# Altium PCB PIC_16g628aPCB.PcbDoc
Units mil, origin at the board's own origin, x right, y up, seen from the top; angles counter-clockwise.
Board outline 6000 x 4000 mil, 2 copper layers (Top Layer, Bottom Layer); 5 components, 18 nets, 45 pads, 0 vias.
Unrouted connection lines stored in the file: 26.
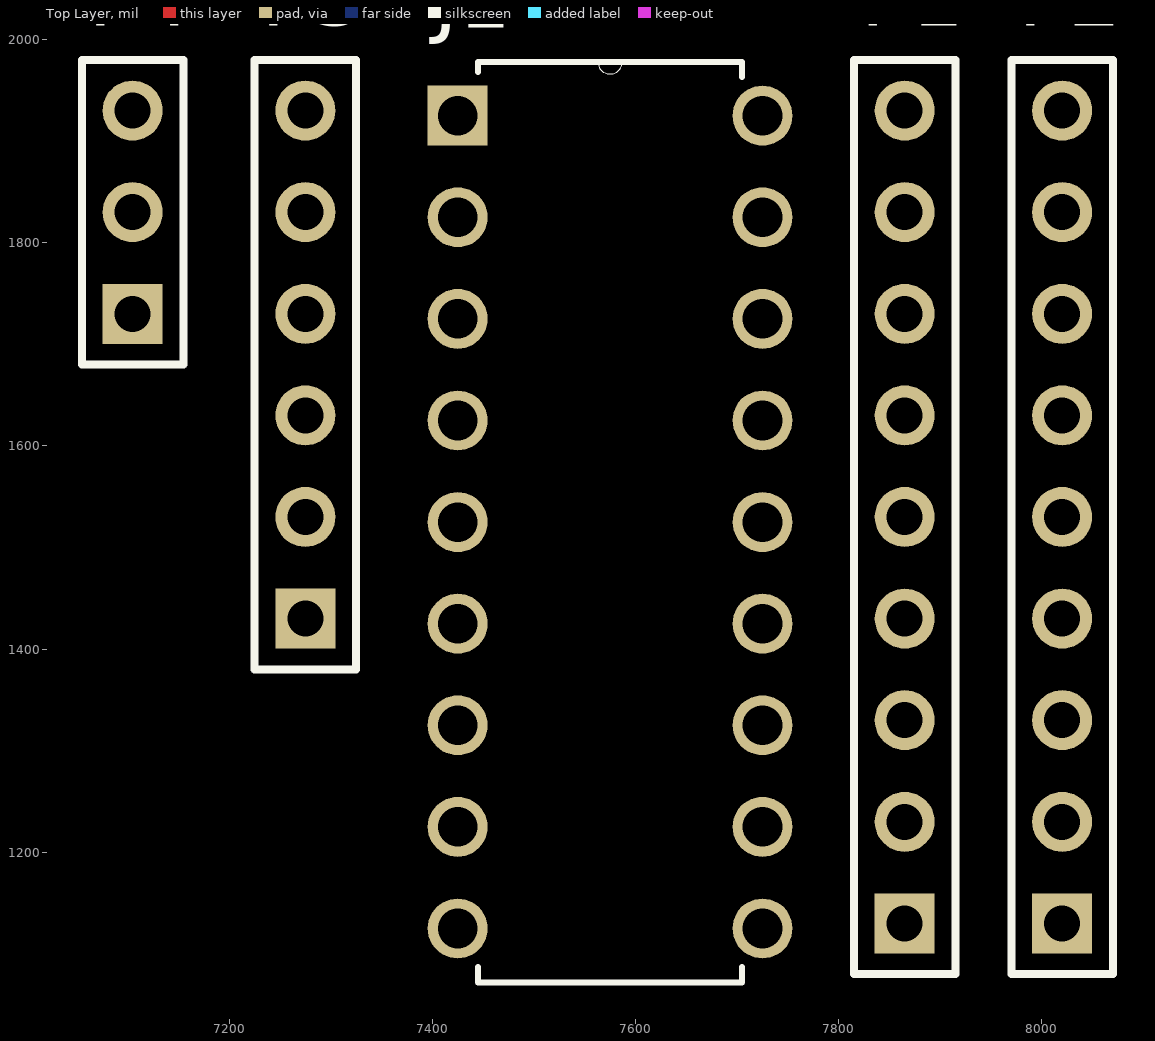
[diagram p0: Top Layer view]
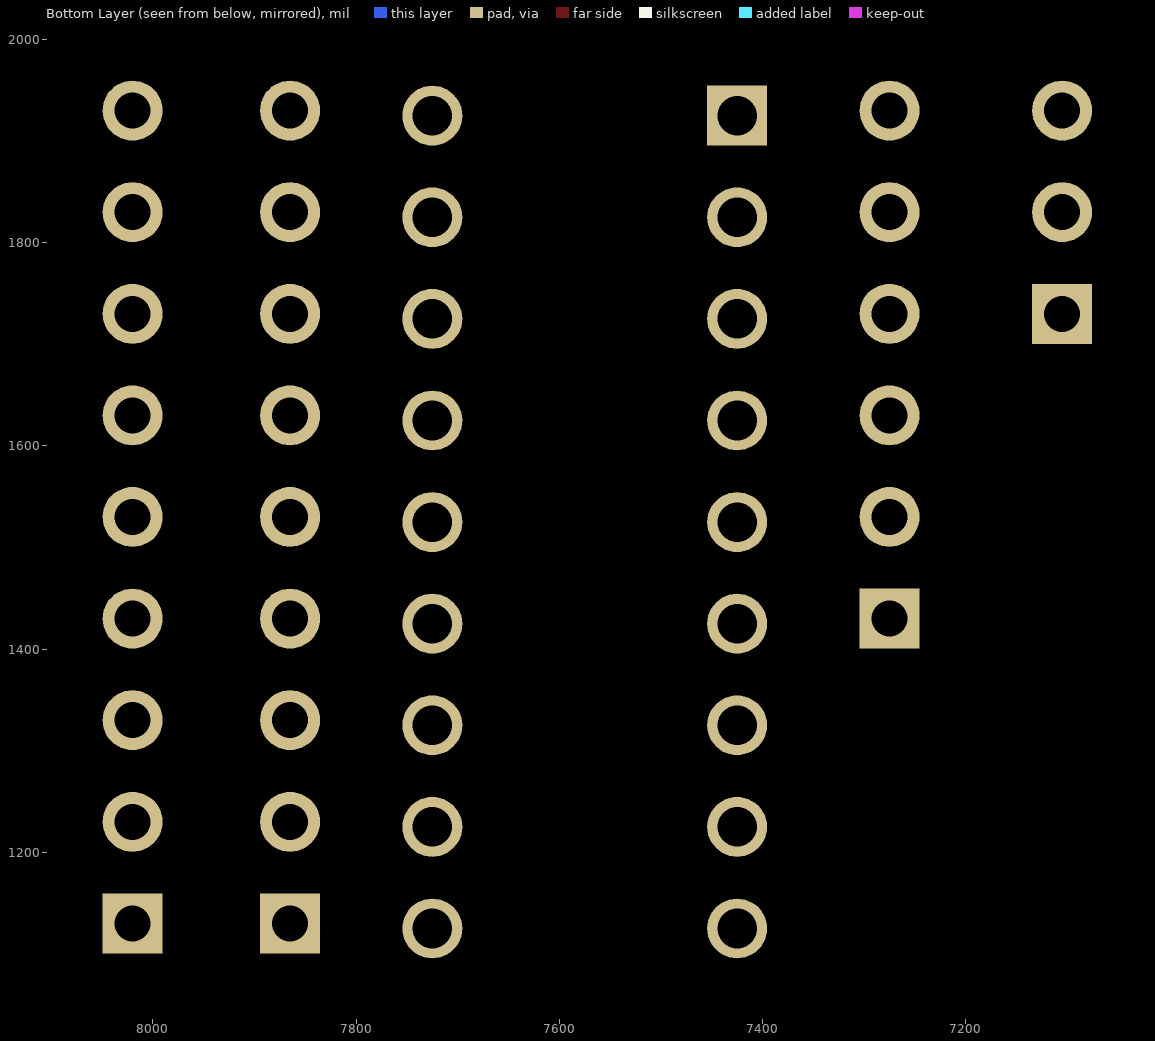
[diagram p1: Bottom Layer view, seen from below]

## Layer stack, top to bottom
Top Solder: solder mask 0.4, Solder Resist, Dk 3.5
Top Layer: signal copper 1.4
Dielectric 1: dielectric 12.6, FR-4, Dk 4.8
Bottom Layer: signal copper 1.4
Bottom Solder: solder mask 0.4, Solder Resist, Dk 3.5

## Board outline
1000,1000 7000,1000 7000,5000 1000,5000

## Design rules (kind name [scope] priority, off if disabled: settings)
Clearance [All] p1: gap=10
PolygonConnect [All] p1: connectstyle=Relief reliefconductorwidth=10 reliefentries=4 polygonreliefangle="90 Angle" airgapwidth=10
RoomDefinition PIC_16g628aSCH [InComponentClass('PIC_16g628aSCH')] p1: confinementstyle=ConfineIn formatcopy=TRUE lockcomponents=FALSE outline 7045,1060 8095,1060 8095,2090 7045,2090
RoutingVias [All] p1: holewidth=28 width=50 viastyle="Through Hole" minholewidth=28 minwidth=50 maxholewidth=28 maxwidth=50
SolderMaskExpansion [All] p1: expansion=4
Width [All] p1: maxlimit=10 minlimit=10 preferedwidth=10
30 further rules are at their usual default settings.

## Components (designator, comment, footprint, x,y, rotation, side; value= is the part's Value field where it differs from the comment)
J1 "PIC16F628-20/P" DIP254P762X432-18 7725,1125 r0 top
P1 "Header 9" HDR1X9 7865,1130 r90 top
P2 "Header 9" HDR1X9 8020,1130 r90 top
P3 "Header 6" HDR1X6 7275,1430 r90 top
P4 "Header 3" HDR1X3 7105,1730 r90 top

## Footprints (in the part's own frame and the unit in brackets; to place one, negate y for a bottom-side part, rotate by r counter-clockwise, add the part's x,y. Pads: shape width x height; smd on the part's side, far side on the other; paste and mask are expansions set on the pad)
DIP254P762X432-18 [mil]
  rect 59x59 hole 39: 1(-300,800)
  round 59 hole 39: 2(-300,700) 3(-300,600) 4(-300,500) 5(-300,400) 6(-300,300) 7(-300,200) 8(-300,100) 9(-300,0) 10(0,0) 11(0,100) 12(0,200) 13(0,300) 14(0,400) 15(0,500) 16(0,600) 17(0,700) 18(0,800)
  silkscreen extent -280,-53 -20,853
HDR1X3 [mm] "Connector; Header; 3 Position"
  rect 1.5x1.5 hole 0.9: 1(0,0)
  round 1.5 hole 0.9: 2(2.54,0) 3(5.08,0)
  silkscreen extent -1.27,-1.27 6.35,1.27
HDR1X6 [mm] "Connector; Header; 6 Position"
  rect 1.5x1.5 hole 0.9: 1(0,0)
  round 1.5 hole 0.9: 2(2.54,0) 3(5.08,0) 4(7.62,0) 5(10.16,0) 6(12.7,0)
  silkscreen extent -1.27,-1.27 13.97,1.27
HDR1X9 [mm] "Connector; Header; 9 Position"
  rect 1.5x1.5 hole 0.9: 1(0,0)
  round 1.5 hole 0.9: 2(2.54,0) 3(5.08,0) 4(7.62,0) 5(10.16,0) 6(12.7,0) 7(15.24,0) 8(17.78,0) 9(20.32,0)
  silkscreen extent -1.27,-1.27 21.59,1.27

## Part data
J1: "8-Bit CMOS Microcontroller"
P1 P2: "Header, 9-Pin"
P3: "Header, 6-Pin"
P4: "Header, 3-Pin"

## Nets (pads, with @x,y where several pads share a name; then routed paths per layer and width w, separated by ;. In a path a pad name is that pad's centre, name@x,y a point inside that pad or via, vN(x,y) a via of type N, cw(c..) or ccw(c..) an arc to the next point about the centre after c; other vN are vias at no path point)
NetJ1_1: J1.1 P2.1
NetJ1_2: J1.2 P2.2
NetJ1_3: J1.3 P2.3
NetJ1_4: J1.4 P2.4 P3.1
NetJ1_5: J1.5 P2.5 P3.3
NetJ1_6: J1.6 P2.6
NetJ1_7: J1.7 P2.7 P4.1
NetJ1_8: J1.8 P2.8 P4.3
NetJ1_9: J1.9 P2.9
NetJ1_10: J1.10 P1.1 P3.6
NetJ1_11: J1.11 P1.2
NetJ1_12: J1.12 P1.3 P3.5
NetJ1_13: J1.13 P1.4 P3.4
NetJ1_14: J1.14 P1.5 P3.2
NetJ1_15: J1.15 P1.6
NetJ1_16: J1.16 P1.7
NetJ1_17: J1.17 P1.8
NetJ1_18: J1.18 P1.9
pads on no net: P4.2